# Altium PCB canctuator_1ch.PcbDoc
Units mm, origin at the board's own origin, x right, y up, seen from the top; angles counter-clockwise.
Board outline 13 x 30 mm, 2 copper layers (Top Layer, Bottom Layer); 19 components, 26 nets, 105 pads, 37 vias.
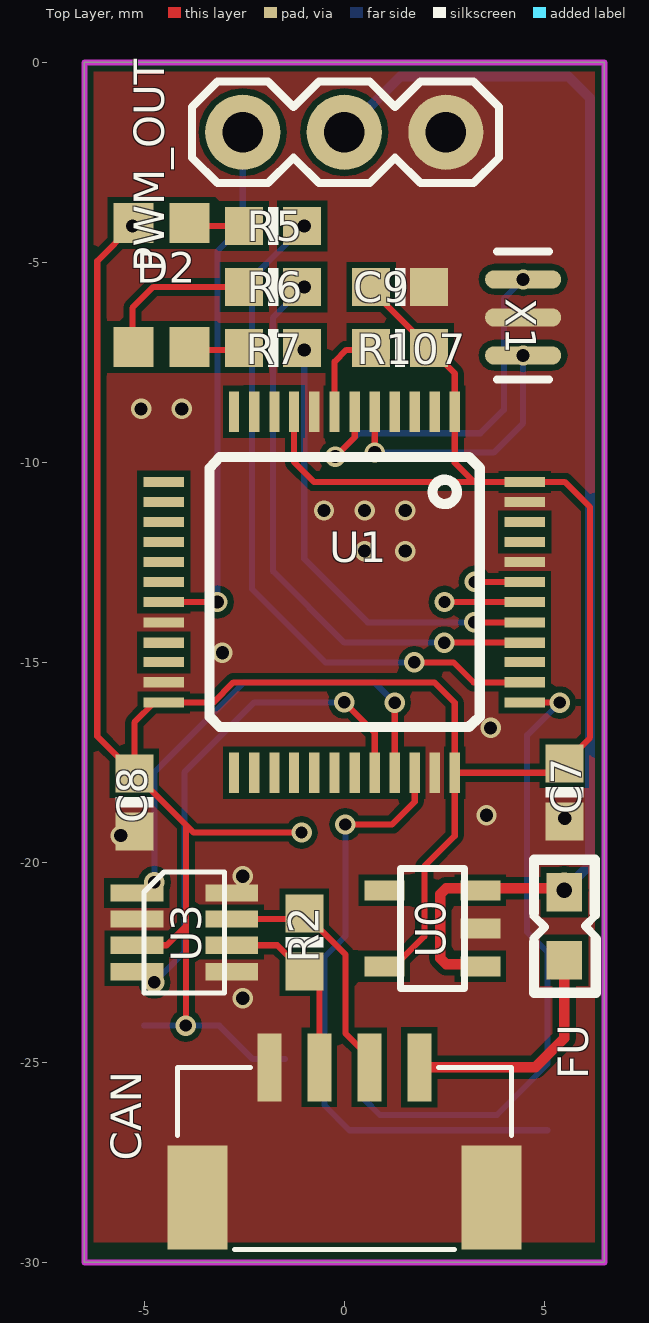
[diagram p0: Top Layer view]
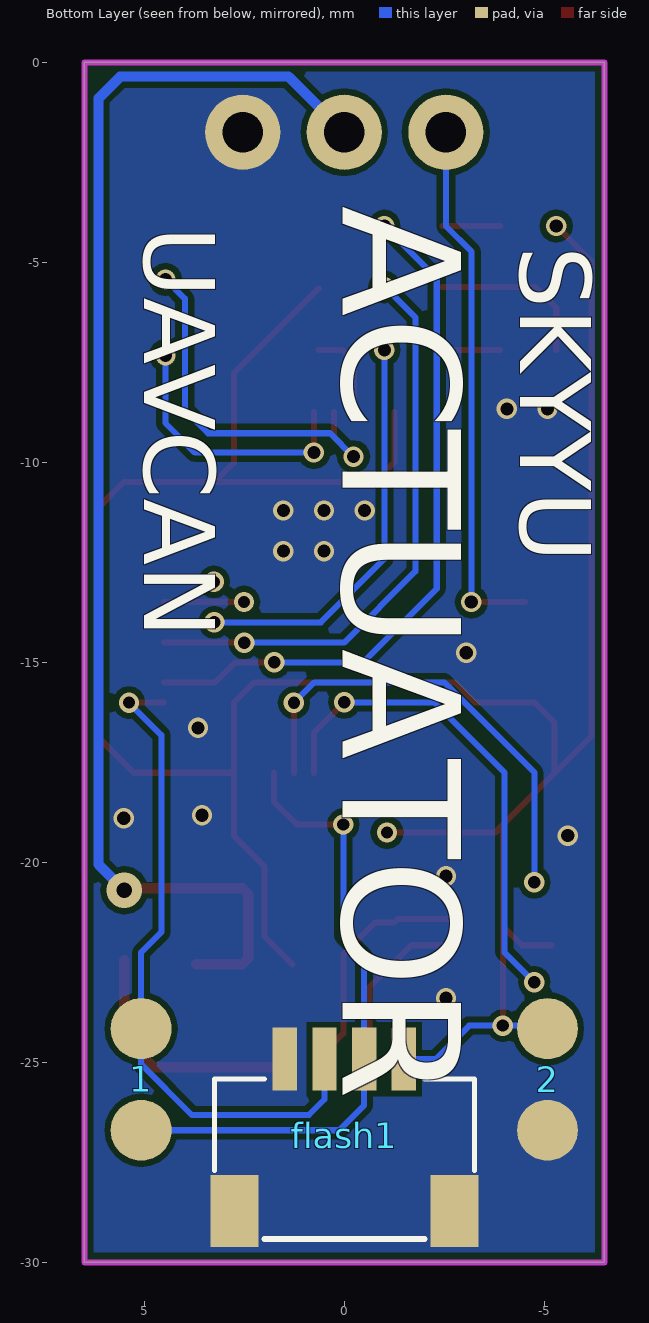
[diagram p1: Bottom Layer view, seen from below]
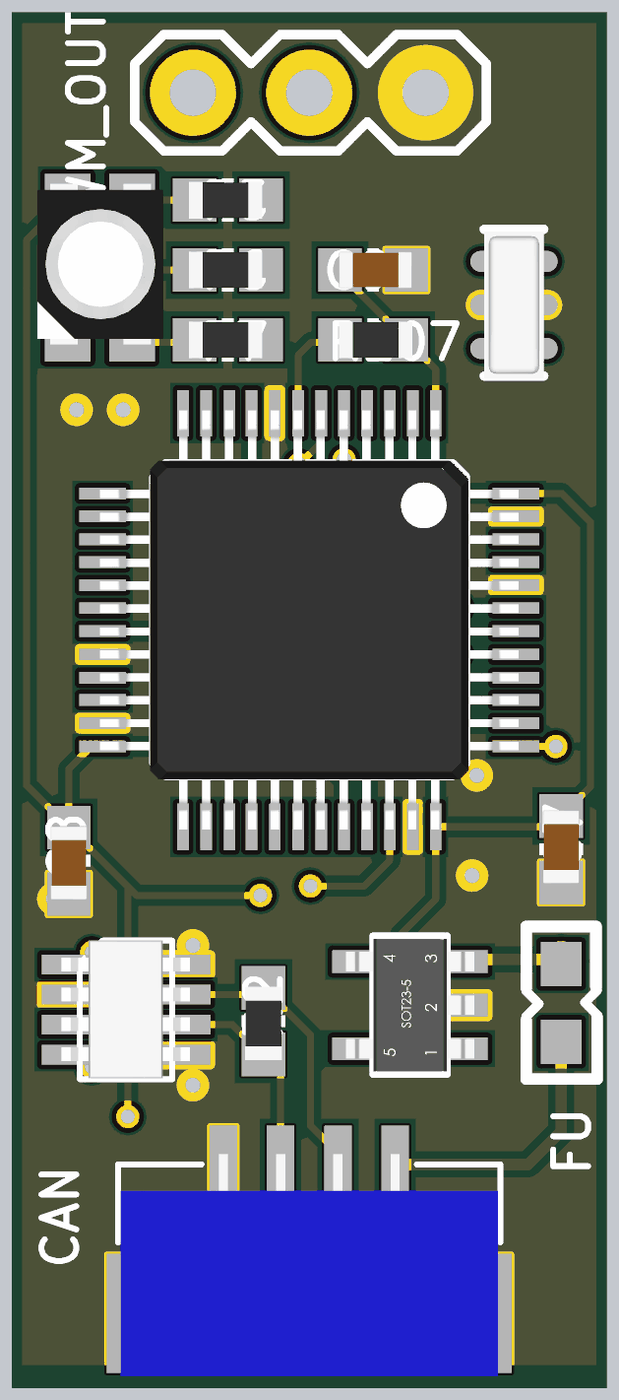
[diagram p2: 3D render of the assembled board from above, using the file's embedded part models]

## Layer stack, top to bottom
Top Solder: solder mask 0.0102, Solder Resist, Dk 3.5
Top Layer: signal copper 0.0356
Dielectric 1: dielectric 0.32, FR-4, Dk 4.8
Bottom Layer: signal copper 0.0356
Bottom Solder: solder mask 0.0102, Solder Resist, Dk 3.5

## Board outline
-6.5,-30 -6.5,0 6.5,0 6.5,-30

## Design rules (kind name [scope] priority, off if disabled: settings)
Clearance [All] p1: gap=0.152
ComponentClearance [All] p1 off: gap=0.254 collisioncheckmode=3 verticalgap=0.254 showdistances=FALSE
PolygonConnect [All] p1: connectstyle=Direct reliefconductorwidth=0.065 reliefentries=4 polygonreliefangle="90 Angle" airgapwidth=0
RoutingVias [All] p1: holewidth=0.711 width=1.27 viastyle="Through Hole" minholewidth=0.711 minwidth=1.27 maxholewidth=0.711 maxwidth=1.27
SolderMaskExpansion [All] p1: expansion=0.102
Width [All] p1: maxlimit=0.762 minlimit=0.152 preferedwidth=0.254
29 further rules are at their usual default settings.

## Classes and differential pairs
component class CANPWM: C7 C8 C9 CAN D2 flash1 FU PWM_OUT R2 R5 R6 R7 R107 U0 U1 U3 X1

## Components (designator, comment, footprint, x,y, rotation, side; value= is the part's Value field where it differs from the comment)
1 "Comment" PAD2_2.54 5.08,-25.428 r270 bottom
2 "Comment" PAD2_2.54 -5.08,-25.428 r90 bottom
C7 "0.1uF" C0603 5.5,-18.25 r90 top
C8 "0.1uF" C0603 -5.25,-18.5 r270 top
C9 "0.1uF" C0603 1.397,-5.616 r0 top
CAN "J-GH1.25-04P" SM04B-GHS-TB 0,-26.25 r180 top
D2 "RGB_3528" RGB_3528 -4.572,-5.616 r270 top
flash1 "J-SH1.0-04P" SM04B-SRSS-TB 0,-24.92 r0 bottom
FU "1.1A" L0603 5.5,-21.6 r90 top
PWM_OUT "Header2.54-3" Header2.54-3 0,-1.75 r0 top
R2 "120" R0603 -1,-22 r270 top
R5 "10k" R0603 -1.778,-4.092 r180 top
R6 "10k" R0603 -1.778,-5.616 r180 top
R7 "10k" R0603 -1.778,-7.14 r180 top
R107 "10K" R0603 1.397,-7.14 r0 top
U0 "MIC5205" SOT23-5 2.2,-21.65 r180 top
U1 "STM32F103C8Tx" LQFP48 0,-13.25 r270 top
U3 "MAX3051" SOT23-8 -4,-21.75 r0 top
X1 "CSTCE8M" XTAL-CSTCE 4.47,-6.378 r90 top

## Footprints (in the part's own frame and the unit in brackets; to place one, negate y for a bottom-side part, rotate by r counter-clockwise, add the part's x,y. Pads: shape width x height; smd on the part's side, far side on the other; paste and mask are expansions set on the pad)
C0603 [mm]
  rect 0.95x0.95 smd mask+0.051: 1(-0.725,0) 2(0.725,0)
  silkscreen extent -0.13,-0.48 0.13,0.47, body extent -0.75,-0.4 0.85,0.4, height 0.6
Header2.54-3 [mil]
  round 74 hole 40: 1(-100,0) 2(0,0) 3(100,0)
  silkscreen extent -150,-50 152,50
L0603 [mil]
  rect 38x35 smd: 1(-33.44,0) 2(33.44,0)
  silkscreen extent -65,-31 66,30, body extent -29,-15 31,15, height 20
LQFP48 [mil]
  rect 40x10 smd: 1(-177.58,108.68) 2(-177.58,89) 3(-177.58,69.31) 4(-177.58,49.63) 5(-177.58,29.94) 6(-177.58,10.26) 7(-177.58,-9.58) 8(-177.58,-29.58) 9(-177.58,-49.58) 10(-177.58,-68.58) 11(-177.58,-88.58) 12(-177.58,-108.58) 25(177.58,-108.58) 26(177.58,-88.58) 27(177.58,-68.58) 28(177.58,-49.58) 29(177.58,-29.58) 30(177.58,-9.58) 31(177.58,10.26) 32(177.58,29.94) 33(177.58,49.63) 34(177.58,69.31) 35(177.58,89) 36(177.58,108.68)
  rect 10x40 smd: 13(-108.68,-177.58) 14(-89,-177.58) 15(-69.31,-177.58) 16(-49.63,-177.58) 17(-29.94,-177.58) 18(-10.26,-177.58) 19(9.58,-177.58) 20(29.58,-177.58) 21(49.58,-177.58) 22(68.58,-177.58) 23(88.58,-177.58) 24(108.58,-177.58) 37(108.58,177.58) 38(88.58,177.58) 39(68.58,177.58) 40(49.58,177.58) 41(29.58,177.58) 42(9.58,177.58) 43(-10.26,177.58) 44(-29.94,177.58) 45(-49.63,177.58) 46(-69.31,177.58) 47(-89,177.58) 48(-108.68,177.58)
  silkscreen extent -133,-133 133,133, body extent -180,-180 180,180, height 64
PAD2_2.54 [mil]
  round 60 smd: 1(50,0) 2(-50,0)
R0603 [mm]
  rect 0.95x0.95 smd mask+0.051: 1(-0.725,0) 2(0.725,0)
  silkscreen extent -0.13,-0.48 0.13,0.47, body extent -0.75,-0.4 0.85,0.4, height 0.4
RGB_3528 [mm]
  rect 1x1 smd: 1(-1.6,-0.7) 2(-1.6,0.7) 3(1.5,0.7) 4(1.5,-0.7)
  body extent -1.88,-1.36 1.62,1.39, height 1.95
SM04B-GHS-TB [mm]
  rect 0.6x1.7 smd mask+0.051: 1(-1.875,-1.125) 2(-0.625,-1.125) 3(0.625,-1.125) 4(1.875,-1.125)
  rect 1.5x2.6 smd mask+0.051: GND(-3.675,2.125) GND(3.675,2.125)
  silkscreen extent -4.18,-1.12 4.17,3.43, body extent -4.13,-1.35 4.13,3.5, height 4.25
SM04B-SRSS-TB [mil]
  rect 24x62 smd mask+2: 1(-58.5,0) 2(-19.5,0) 3(19.5,0) 4(58.5,0)
  rect 47.24x70.87 smd mask+2: GND(-108.27,149.61) GND(108.27,149.61)
  silkscreen extent -128,19 128,177, body extent -118,-18 118,177, height 116
SOT23-5 [mm]
  rect 1x0.5 smd: 1(-1.2,0.95) 2(-1.2,0) 3(-1.2,-0.95) 4(1.2,-0.95) 5(1.2,0.95)
  silkscreen extent -0.8,-1.5 0.8,1.5, body extent -1.4,-1.45 1.4,1.45, height 1.09
SOT23-8 [mil]
  rect 52x17 smd: 1(-46.63,38.69) 2(-46.63,13.1) 3(-46.63,-12.69) 4(-46.63,-38.69) 5(46.63,-38.69) 6(46.63,-12.69) 7(46.63,13.1) 8(46.63,38.69)
  silkscreen extent -40,-60 40,59, body extent -56,-59 55,59, height 44
XTAL-CSTCE [mil]
  rrect100% 18x75 smd: 1(-37.4,0) 2(0,0) 3(37.4,0)
  silkscreen extent -61,-26 65,26, body extent -63,-26 63,26, height 40

## Part data
C7 C8 C9: library part Capacitor
FU: library part FU
R2 R5 R6 R7 R107: library part Resistor

## Via types
v1: diameter 0.508, hole 0.33, Top Layer to Bottom Layer, 23 vias
v2: diameter 0.508, hole 0.305, Top Layer to Bottom Layer, 13 vias
v3: diameter 0.889, hole 0.381, Top Layer to Bottom Layer, 1 vias

## Nets (pads, with @x,y where several pads share a name; then routed paths per layer and width w, separated by ;. In a path a pad name is that pad's centre, name@x,y a point inside that pad or via, vN(x,y) a via of type N, cw(c..) or ccw(c..) an arc to the next point about the centre after c; other vN are vias at no path point)
3.3V: 2.1 C7.2 C8.1 C9.1 D2.1 flash1.1 R107.2 U0.5 U1.1 U1.9 U1.24 U1.36 U1.48 U3.3 | length 71.1
  Top Layer w0.152: v1(-5.297,-4.092) -6.176,-4.971 -6.176,-16.849 C8.1 ; U3.3 -4.442,-22.072 -3.962,-21.593 ; v2(-3.962,-24.082) -3.962,-21.593 ; U1.9 -1.259,-9.991 -0.761,-10.489 3.239,-10.489 ; v2(-1.067,-19.256) -3.769,-19.256 -3.962,-19.063 ; C9.1@0.635,-5.653 2.761,-7.779 2.761,-10.011 3.239,-10.489 ; U0.5@1.3,-22.55 2,-21.85 2,-20.1 2.761,-19.339 2.761,-16.011 2.25,-15.5 -2.772,-15.5 -3.28,-16.008 -4.758,-16.008 -5.25,-16.5 C8.1 ; U1.36 5.264,-17.761 C7.2 6.143,-16.882 6.143,-11.124 5.508,-10.489 3.239,-10.489 ; C8.1 -3.962,-19.063 ; -3.962,-21.593 -3.962,-19.063
  Bottom Layer w0.152: 2.1@-5.004,-24.082 -3.124,-24.082 -2.286,-24.92 flash1.1
CANH: CAN.2 R2.1 U3.7 | length 5.9
  Top Layer w0.152: U3.7 R2.1@-1.333,-21.417 ; R2.1@-1.25,-21.5 -0.775,-21.5 0.025,-22.3 0.025,-24.275 CAN.2@0.625,-24.875
CANL: CAN.3 R2.2 U3.6 | length 4.6
  Top Layer w0.152: U3.6 -1.678,-22.072 -0.625,-23.125 CAN.3
GND: 2.2 C7.1 C8.2 C9.2 CAN.4 CAN.GND flash1.4 flash1.GND PWM_OUT.3 U0.2 U1.8 U1.20 U1.23 U1.35 U1.44 U1.47 U3.2 U3.5 U3.8 X1.2
  other v1: -2.54,-23.396 -2.54,-20.348 -5.588,-19.332 5.512,-18.9 3.556,-18.824 3.658,-16.64 -3.048,-14.76 0.508,-12.22 1.524,-12.22 -0.508,-11.204 0.508,-11.204 1.524,-11.204 -5.08,-8.664 -4.064,-8.664
NetCAN_1: CAN.1 FU.1 | length 5.9
  Top Layer w0.254: CAN.1 4.775,-25.125 5.5,-24.4 FU.1
NetD2_2: D2.2 R5.2 | length 1.4
  Top Layer w0.152: D2.2@-3.897,-4.092 R5.2@-2.452,-4.092
NetD2_3: D2.3 R7.2 | length 1.4
  Top Layer w0.152: D2.3@-3.896,-7.191 R7.2@-2.452,-7.191
NetD2_4: D2.4 R6.2 | length 4.1
  Top Layer w0.152: D2.4@-5.297,-7.192 -5.297,-6.138 -4.775,-5.616 R6.2@-2.452,-5.616
Netflash1_2: 1.1 flash1.2 U1.34 | length 15.8
  Top Layer w0.152: v2(0.025,-19.053) 1.194,-19.053 1.761,-18.486 U1.34
  Bottom Layer w0.152: v2(0.025,-19.053) 0.025,-21.847 -0.495,-22.367 -0.495,-26.076 0.127,-26.698 1.1
Netflash1_3: 1.2 flash1.3 U1.37 | length 16.9
  Top Layer w0.152: U1.37 v2@5.534,-16.008
  Bottom Layer w0.152: flash1.3 0.495,-25.923 0.889,-26.317 3.81,-26.317 5.08,-25.047 1.2 5.08,-22.253 4.572,-21.745 4.572,-16.821 v2(5.385,-16.008)
NetPWM_OUT_1: PWM_OUT.1 U1.19 | length 13.3
  Top Layer w0.152: U1.19 v1(-3.175,-13.493)
  Bottom Layer w0.152: v1(-3.175,-13.493) -3.175,-4.727 -2.54,-4.092 PWM_OUT.1
NetR5_1: R5.1 U1.38 | length 17.4
  Top Layer w0.152: v2(1.75,-15) 2.729,-15 3.229,-15.5 U1.38
  Bottom Layer w0.152: v1(-1.002,-4.092) -2.311,-5.401 -2.311,-13.16 -0.471,-15 v2(1.75,-15)
NetR6_1: R6.1 U1.40 | length 14.5
  Top Layer w0.152: v2(2.5,-14.509) U1.40
  Bottom Layer w0.152: v1@-0.991,-5.591 -1.778,-6.378 -1.778,-12.728 0.003,-14.509 v2(2.5,-14.509)
  other v1: -1.002,-5.616
NetR7_1: R7.1 U1.41 | length 11.4
  Top Layer w0.152: v2@3.25,-14.001 U1.41
  Bottom Layer w0.152: v1(-1.002,-7.191) -1.002,-12.412 0.586,-14 v2(3.25,-14)
NetR107_1: R107.1 U1.7 | length 2.3
  Top Layer w0.152: U1.7 -0.243,-7.485 0.051,-7.191 R107.1@0.647,-7.191
NetU1_5: U1.5 X1.1 | length 6.7
  Top Layer w0.152: v1(0.761,-9.756) U1.5
  Bottom Layer w0.152: v1(0.761,-9.756) 3.734,-9.756 4.47,-9.02 v1(4.47,-7.328)
NetU1_6: U1.6 X1.3 | length 9.5
  Top Layer w0.152: v1(-0.229,-9.858) 0.261,-9.369 U1.6
  Bottom Layer w0.152: v1(-0.229,-9.858) 0.356,-9.274 3.404,-9.274 3.988,-8.689 3.988,-5.911 v1(4.47,-5.428)
NetU1_10: U1.10
NetU1_11: U1.11
NetU1_18: U1.18
NetU1_32: U1.32 U3.4 | length 12.4
  Top Layer w0.152: v2(0,-16) 0.761,-16.761 U1.32
  Bottom Layer w0.152: v2(-4.75,-23) -4,-22.25 -4,-17.75 -2.25,-16 v2(0,-16)
NetU1_33: U1.33 U3.1 | length 11.7
  Top Layer w0.152: U1.33 v2(1.261,-16.011)
  Bottom Layer w0.152: v2(-4.75,-20.5) -4.75,-17.75 -2.5,-15.5 0.75,-15.5 v2(1.261,-16.011)
NetU1_42: U1.42 | length 2
  Top Layer w0.152: v2(2.507,-13.493) U1.42
NetU1_43: U1.43 | length 1.3
  Top Layer w0.152: v2(3.261,-12.989) U1.43
VCC: 
VIN: FU.2 PWM_OUT.2 U0.1 U0.3 | length 33.2
  Top Layer w0.254: U0.1@3.7,-22.55 2.55,-22.55 2.4,-22.4 2.4,-20.8 2.55,-20.65 5.399,-20.65 FU.2
  Bottom Layer w0.254: PWM_OUT.2 1.392,-0.358 5.605,-0.358 6.143,-0.896 6.143,-20.057 v3(5.5,-20.7)
pads on no net: U0.4 U1.2 U1.3 U1.4 U1.12 U1.13 U1.14 U1.15 U1.16 U1.17 U1.21 U1.22 U1.25 U1.26 U1.27 U1.28 U1.29 U1.30 U1.31 U1.39 U1.45 U1.46

## Polygon pours and split planes (outlines as drawn)
GND on Top Layer "Top Layer-No Net" (solid, remove dead copper, pour order 6): -7.493,0.98 7.747,0.98 7.747,-29.5 -7.493,-29.5
GND on Bottom Layer "Top Layer-No Net" (solid, remove dead copper, pour order 4): -8.461,0.73 6.779,0.73 6.779,-29.75 -8.461,-29.75

## Keep-outs
Keep-Out Layer:
  lines w0.152: -6.5,-30 6.5,-30 6.5,0 -5.5,0 -6.5,0 -6.5,-30

## Silkscreen, mask and mechanical layers (free items; w line width, h text height)
Bottom Overlay:
  text "ACTUATOR" at 1.016,-3.584 h5.08 r90
  text "UAVCAN" at 5.588,-4.092 h3.05 r90
  text "SKYYU" at -3.81,-4.6 h3.05 r90